# Altium PCB PowerInjectorPCBv2.PcbDoc
Units mil, origin at the board's own origin, x right, y up, seen from the top; angles counter-clockwise.
Board outline 6000 x 4000 mil, 2 copper layers (Top Layer, Bottom Layer); 7 components, 6 nets, 41 pads, 0 vias.
Unrouted connection lines stored in the file: 2.
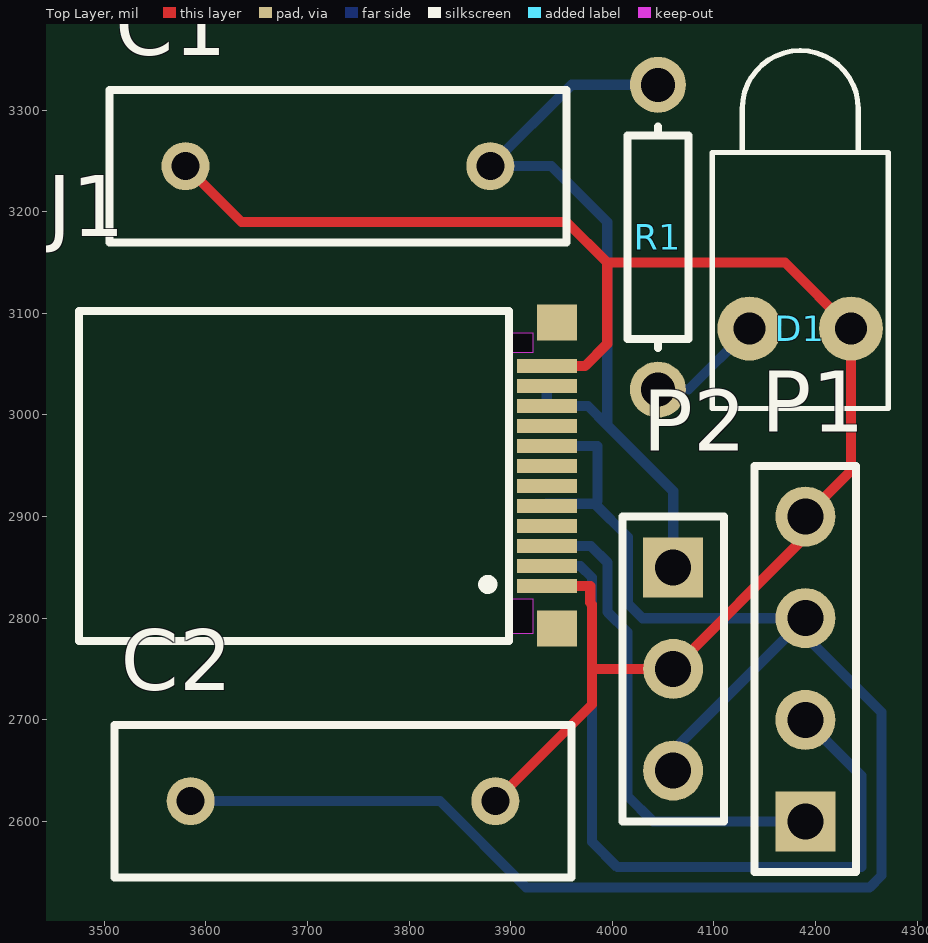
[diagram p0: Top Layer view]
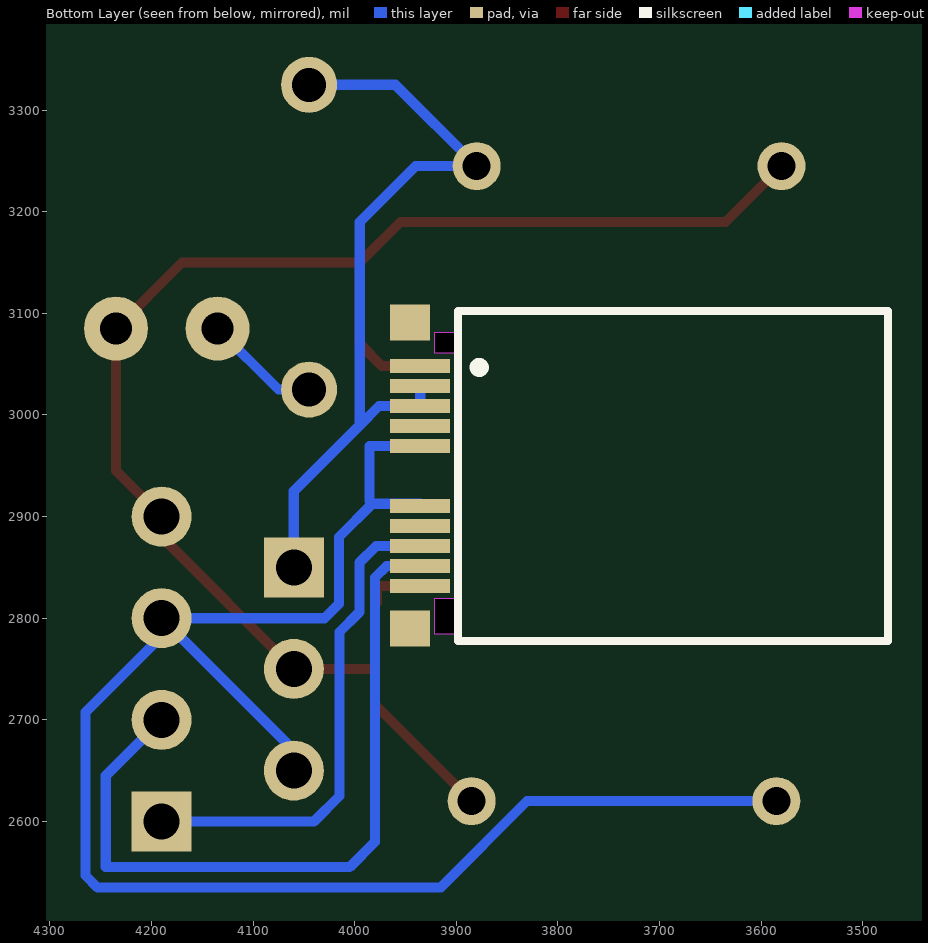
[diagram p1: Bottom Layer view, seen from below]

## Layer stack, top to bottom
Top Solder: solder mask 0.4, Solder Resist, Dk 3.5
Top Layer: signal copper 1.4
Dielectric 1: dielectric 12.6, FR-4, Dk 4.8
Bottom Layer: signal copper 1.4
Bottom Solder: solder mask 0.4, Solder Resist, Dk 3.5

## Board outline
1000,1000 7000,1000 7000,5000 1000,5000

## Design rules (kind name [scope] priority, off if disabled: settings)
Clearance [All] p1: gap=2 ignorepadtopadclearanceinfootprint=FALSE except(0: Arc-Hole Track-Hole SMDPad-Hole THPad-Hole Via-Hole Fill-Hole Poly-Hole Region-Hole Text-Hole)
PolygonConnect [All] p1: connectstyle=Relief reliefconductorwidth=10 reliefentries=4 polygonreliefangle="90 Angle" airgapwidth=10
RoutingVias [All] p1: holewidth=28 width=50 viastyle="Through Hole" minholewidth=28 minwidth=50 maxholewidth=28 maxwidth=50
SolderMaskExpansion [All] p1: expansion=4
Width [All] p1: maxlimit=10 minlimit=10 preferedwidth=10
30 further rules are at their usual default settings.

## Components (designator, comment, footprint, x,y, rotation, side; value= is the part's Value field where it differs from the comment)
C1 "Cap" RAD-0.3 3730,3245 r0 top value=100pF
C2 "Cap" RAD-0.3 3735,2620 r180 top value=100pF
D1 "LED1" LED-1 4185,3085 r90 top
J1 "632712000011" 632712000011 3720,2940 r270 top
P1 "Header 4" HDR1X4 4190,2600 r90 top
P2 "Header 3" HDR1X3 4060,2850 r270 top
R1 "Res1" AXIAL-0.3 4045,3175 r270 top value=1K

## Footprints (in the part's own frame and the unit in brackets; to place one, negate y for a bottom-side part, rotate by r counter-clockwise, add the part's x,y. Pads: shape width x height; smd on the part's side, far side on the other; paste and mask are expansions set on the pad)
632712000011 [mm] "USB 3.1 Type C Plug Horizontal SMT"
  rect 0.35x1.5 smd: A1(2.75,5.475) A2(2.25,5.475) A3(1.75,5.475) A4(1.25,5.475) A5(0.75,5.475) A6(0.25,5.475) A7(-0.25,5.475) A8(-0.75,5.475) A9(-1.25,5.475) A10(-1.75,5.475) A11(-2.25,5.475) A12(-2.75,5.475)
  rect 0.35x1.5 smd far side: B1(-2.75,5.475) B2(-2.25,5.475) B3(-1.75,5.475) B4(-1.25,5.475) B5(-0.75,5.475) B8(0.75,5.475) B9(1.25,5.475) B10(1.75,5.475) B11(2.25,5.475) B12(2.75,5.475)
  rect 0.9x1 smd: Shell(-3.83,5.725) Shell(3.82,5.725)
  rect 0.9x1 smd far side: Shell(-3.83,5.725) Shell(3.82,5.725)
  Keep-Out Layer board cut-out: 3.075,4.525 3.075,5.125 3.945,5.125 3.945,4.525
  Keep-Out Layer board cut-out: -3.58,4.525 -3.58,5.125 -3.08,5.125 -3.08,4.525
  silkscreen extent -4.13,-6.23 4.13,4.52, body extent -5.13,-7.18 5.12,6.22, height 1.9
AXIAL-0.3 [mm] "Axial Device, Thru-Hole; 2 Leads; 0.3 in Pin Spacing"
  round 1.4 hole 0.85: 1(-3.81,0) 2(3.81,0)
  silkscreen extent -2.77,-0.76 2.77,0.76
HDR1X3 [mm] "Connector; Header; 3 Position"
  rect 1.5x1.5 hole 0.9: 1(0,0)
  round 1.5 hole 0.9: 2(2.54,0) 3(5.08,0)
  silkscreen extent -1.27,-1.27 6.35,1.27
HDR1X4 [mm] "Connector; Header; 4 Position"
  rect 1.5x1.5 hole 0.9: 1(0,0)
  round 1.5 hole 0.9: 2(2.54,0) 3(5.08,0) 4(7.62,0)
  silkscreen extent -1.27,-1.27 8.89,1.27
LED-1 [mm] "LED; 2 Leads"
  round 1.6 hole 0.8: 1(0,1.27) 2(0,-1.27)
  silkscreen extent -2,-2.2 6.95,2.2
RAD-0.3 [mm] "Radial Cap, Thru-Hole; 2 Leads; 0.3 in Pin Spacing"
  round 1.2 hole 0.7: 1(-3.81,0) 2(3.81,0)
  silkscreen extent -5.71,-1.91 5.71,1.91

## Part data
C1 C2: "Capacitor", LatestRevisionDate=17-Jul-2002, LatestRevisionNote="Re-released for DXP Platform.", PackageDescription="Radial Cap, Thru-Hole; 2 Leads; 0.3 in Pin Spacing", PackageReference=RAD-0.3, Published=8-Jun-2000, Publisher="Altium Limited"
D1: "Typical RED GaAs LED", LatestRevisionDate=08-Jul-2005, LatestRevisionNote="Mech Layer 1 removed.", PackageDescription="LED; 2 Leads", PackageReference=LED-1, Published=8-Jun-2000, Publisher="Altium Limited"
J1: "USB 3.1 Type C Plug Horizontal SMT WR-COM", ComponentLink1Description=Manufacturer, ComponentLink1URL=http://www.we-online.de, ComponentLink2Description=Datasheet, ComponentLink2URL=http://katalog.we-online.de/em/datasheet/632712000011.pdf, Construction=SMT, Gender=Plug, Interface Type="Type C", Part Number=632712000011, Published Date="April 2017", Publisher="Wurth Elektronik", Sub-Family="USB 3.1", Type=Horizontal
P1: "Header, 4-Pin", LatestRevisionDate=17-Jul-2002, LatestRevisionNote="Re-released for DXP Platform.", Publisher="Altium Limited"
P2: "Header, 3-Pin", LatestRevisionDate=17-Jul-2002, LatestRevisionNote="Re-released for DXP Platform.", Publisher="Altium Limited"
R1: "Resistor", LatestRevisionDate=17-Jul-2002, LatestRevisionNote="Re-released for DXP Platform.", PackageDescription="Axial Device, Thru-Hole; 2 Leads; 0.3 in Pin Spacing", PackageReference=AXIAL-0.3, Published=8-Jun-2000, Publisher="Altium Limited"

## Nets (pads, with @x,y where several pads share a name; then routed paths per layer and width w, separated by ;. In a path a pad name is that pad's centre, name@x,y a point inside that pad or via, vN(x,y) a via of type N, cw(c..) or ccw(c..) an arc to the next point about the centre after c; other vN are vias at no path point)
+5: C1.2 J1.B2 J1.B3 P2.1 R1.1 | length 789.8
  Bottom Layer w10: J1.B2 J1.B3 3976.1,3008.9 3995,2990 ; R1.1 3960,3325 C1.2 3940,3245 3995,3190 3995,2990 ; P2.1 4060,2925 3995,2990
+12: C2.2 J1.B5 J1.B8 P1.3 P2.3 | length 1655.8
  Bottom Layer w10: C2.2 3830.38,2620 3915.38,2535 4253.28,2535 4265,2546.72 4265,2707.5 4190,2782.5 P1.3 ; J1.B8@3935.55,2912.68 3982.68,2912.68 ; J1.B5 3985.47,2969.53 3985.47,2915.47 3982.68,2912.68 ; P2.3 4060,2670 P1.3 ; 3982.68,2912.68 4015.47,2879.88 4015.47,2814.26 4029.73,2800 P1.3
CANH: J1.B10 P1.1 | length 489.8
  Bottom Layer w10: J1.B10 3978.9,2871.1 3995.47,2854.53 3995.47,2805.97 4015,2786.45 4015,2625 4040,2600 P1.1
CANL: J1.B11 P1.2 | length 752.3
  Bottom Layer w10: J1.B11 3968.58,2851.42 3980,2840 3980,2580 4005,2555 4245,2555 4245,2645 P1.2
GND: C1.1 C2.1 D1.2 J1.A1 J1.A12 J1.B1 J1.B12 P1.4 P2.2 | length 1651.7
  Top Layer w10: C1.1 3635,3190 3955,3190 3995,3150 ; C2.1 3980.08,2715.08 3980.08,2750 ; J1.A1 3978.27,2831.73 3978.27,2815.34 3980.08,2813.54 3980.08,2750 ; J1.A12 3973.27,3048.27 3995,3070 3995,3150 ; 3980.08,2750 P2.2 4190,2880 P1.4 4235,2945 D1.2 4170,3150 3995,3150
NetD1_1: D1.1 R1.2 | length 114.9
  Bottom Layer w10: R1.2 4075,3025 D1.1
pads on no net: J1.A2 J1.A3 J1.A4 J1.A5 J1.A6 J1.A7 J1.A8 J1.A9 J1.A10 J1.A11 J1.B4 J1.B9 J1.Shell